# Altium PCB 24+Channel+PCB.pcbdoc (part 1 of 4)
Units mm, origin at the board's own origin, x right, y up, seen from the top; angles counter-clockwise.
Board outline 213.4 x 117.5 mm, 2 copper layers (Top Layer, Bottom Layer); 559 components, 339 nets, 1681 pads, 746 vias.
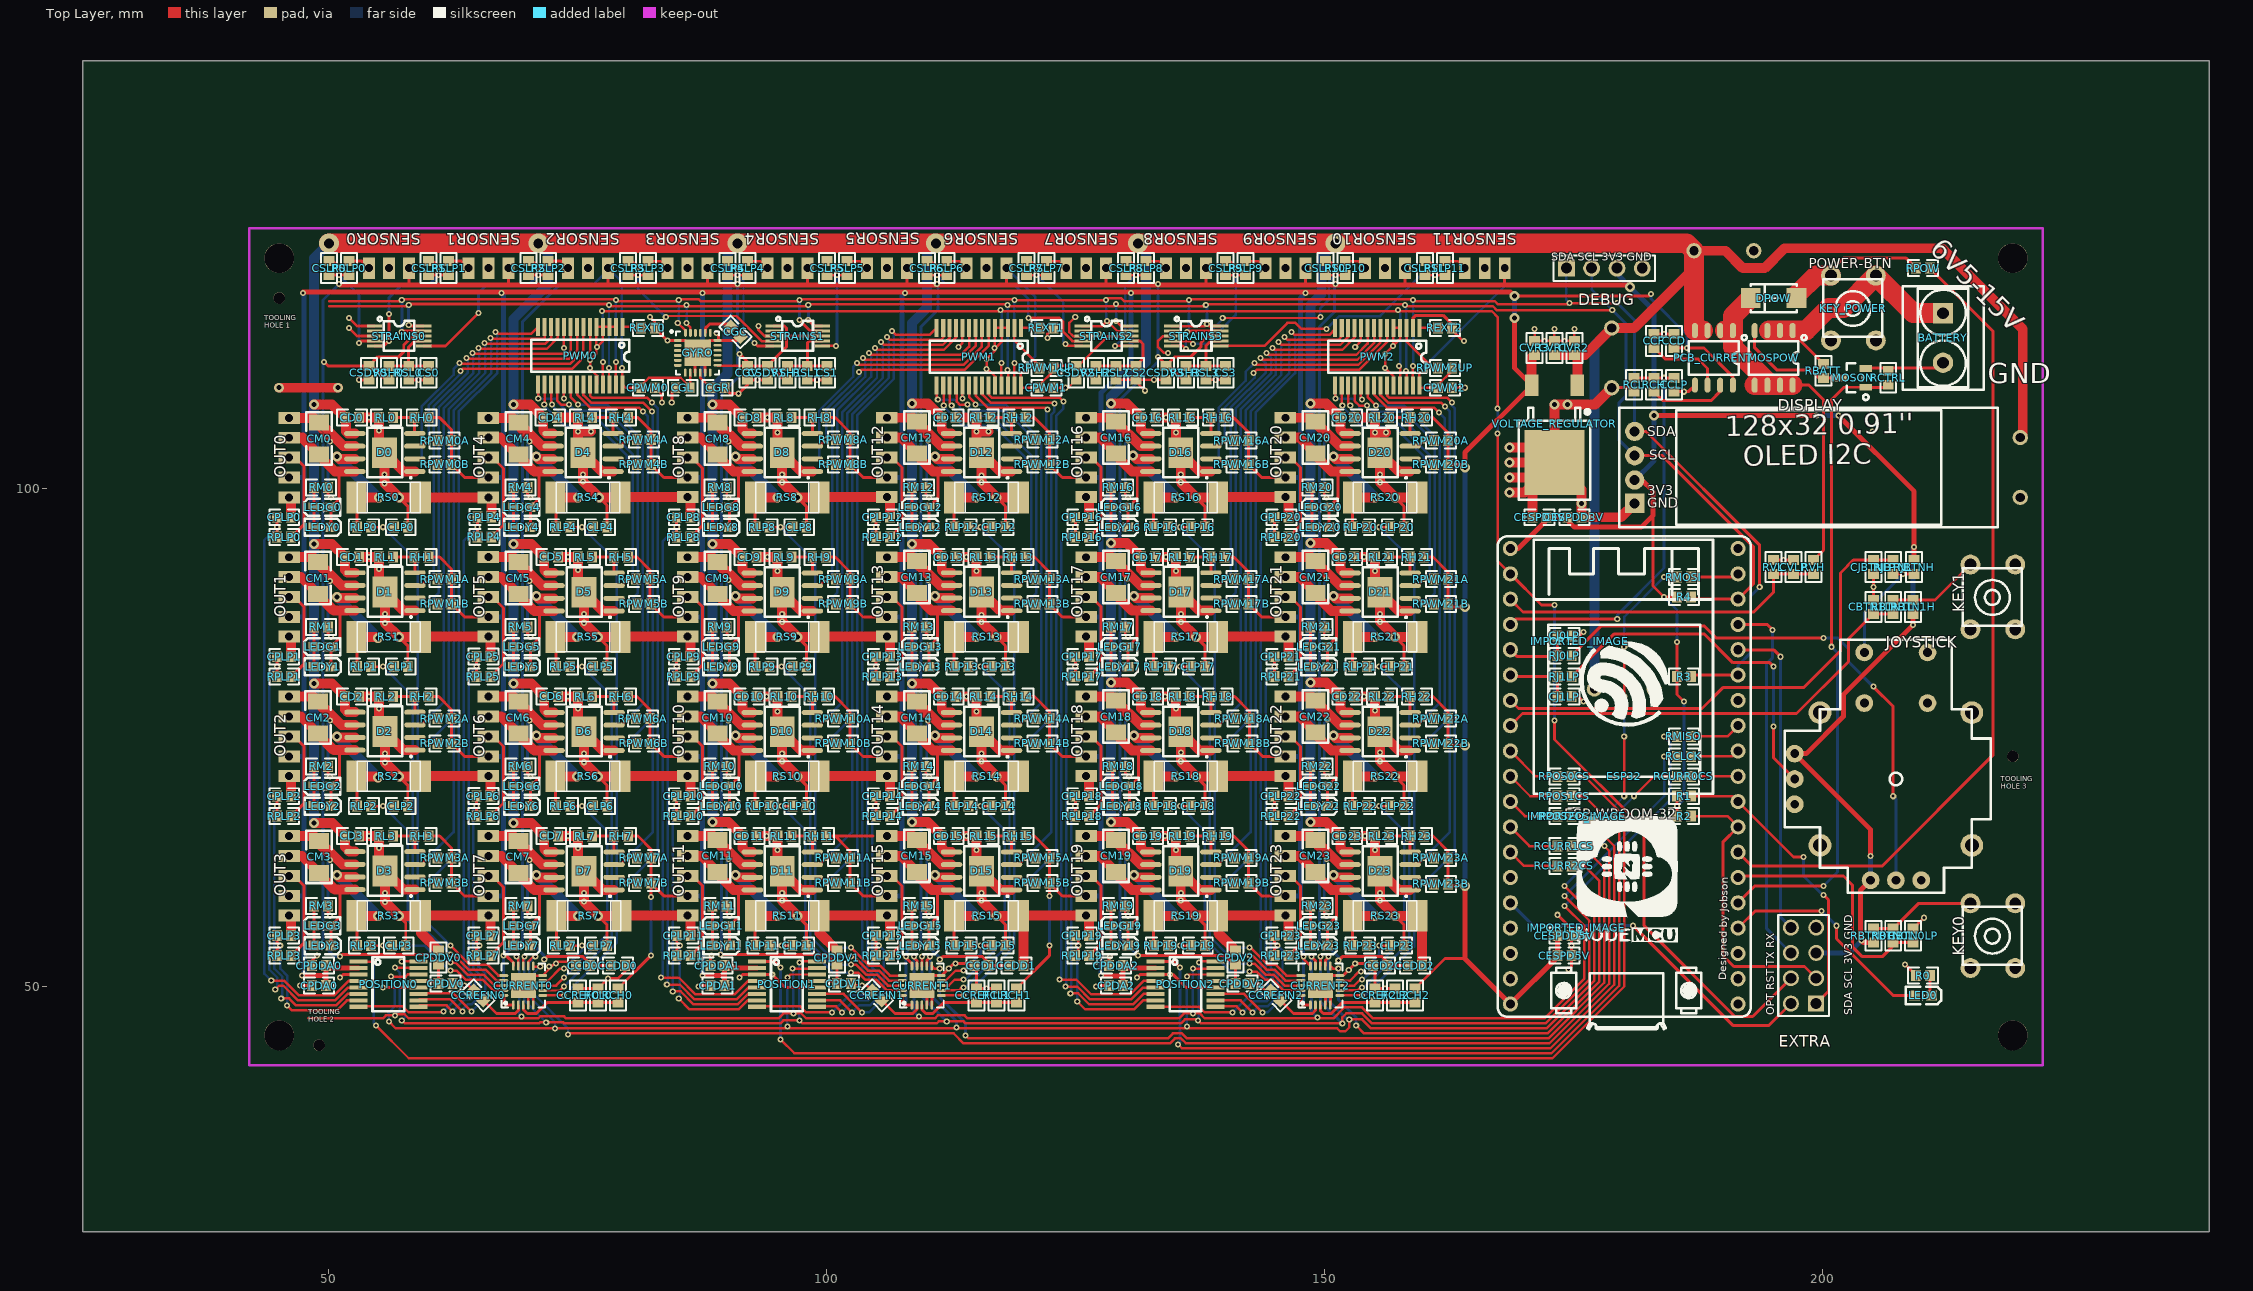
[diagram p0: Top Layer view]
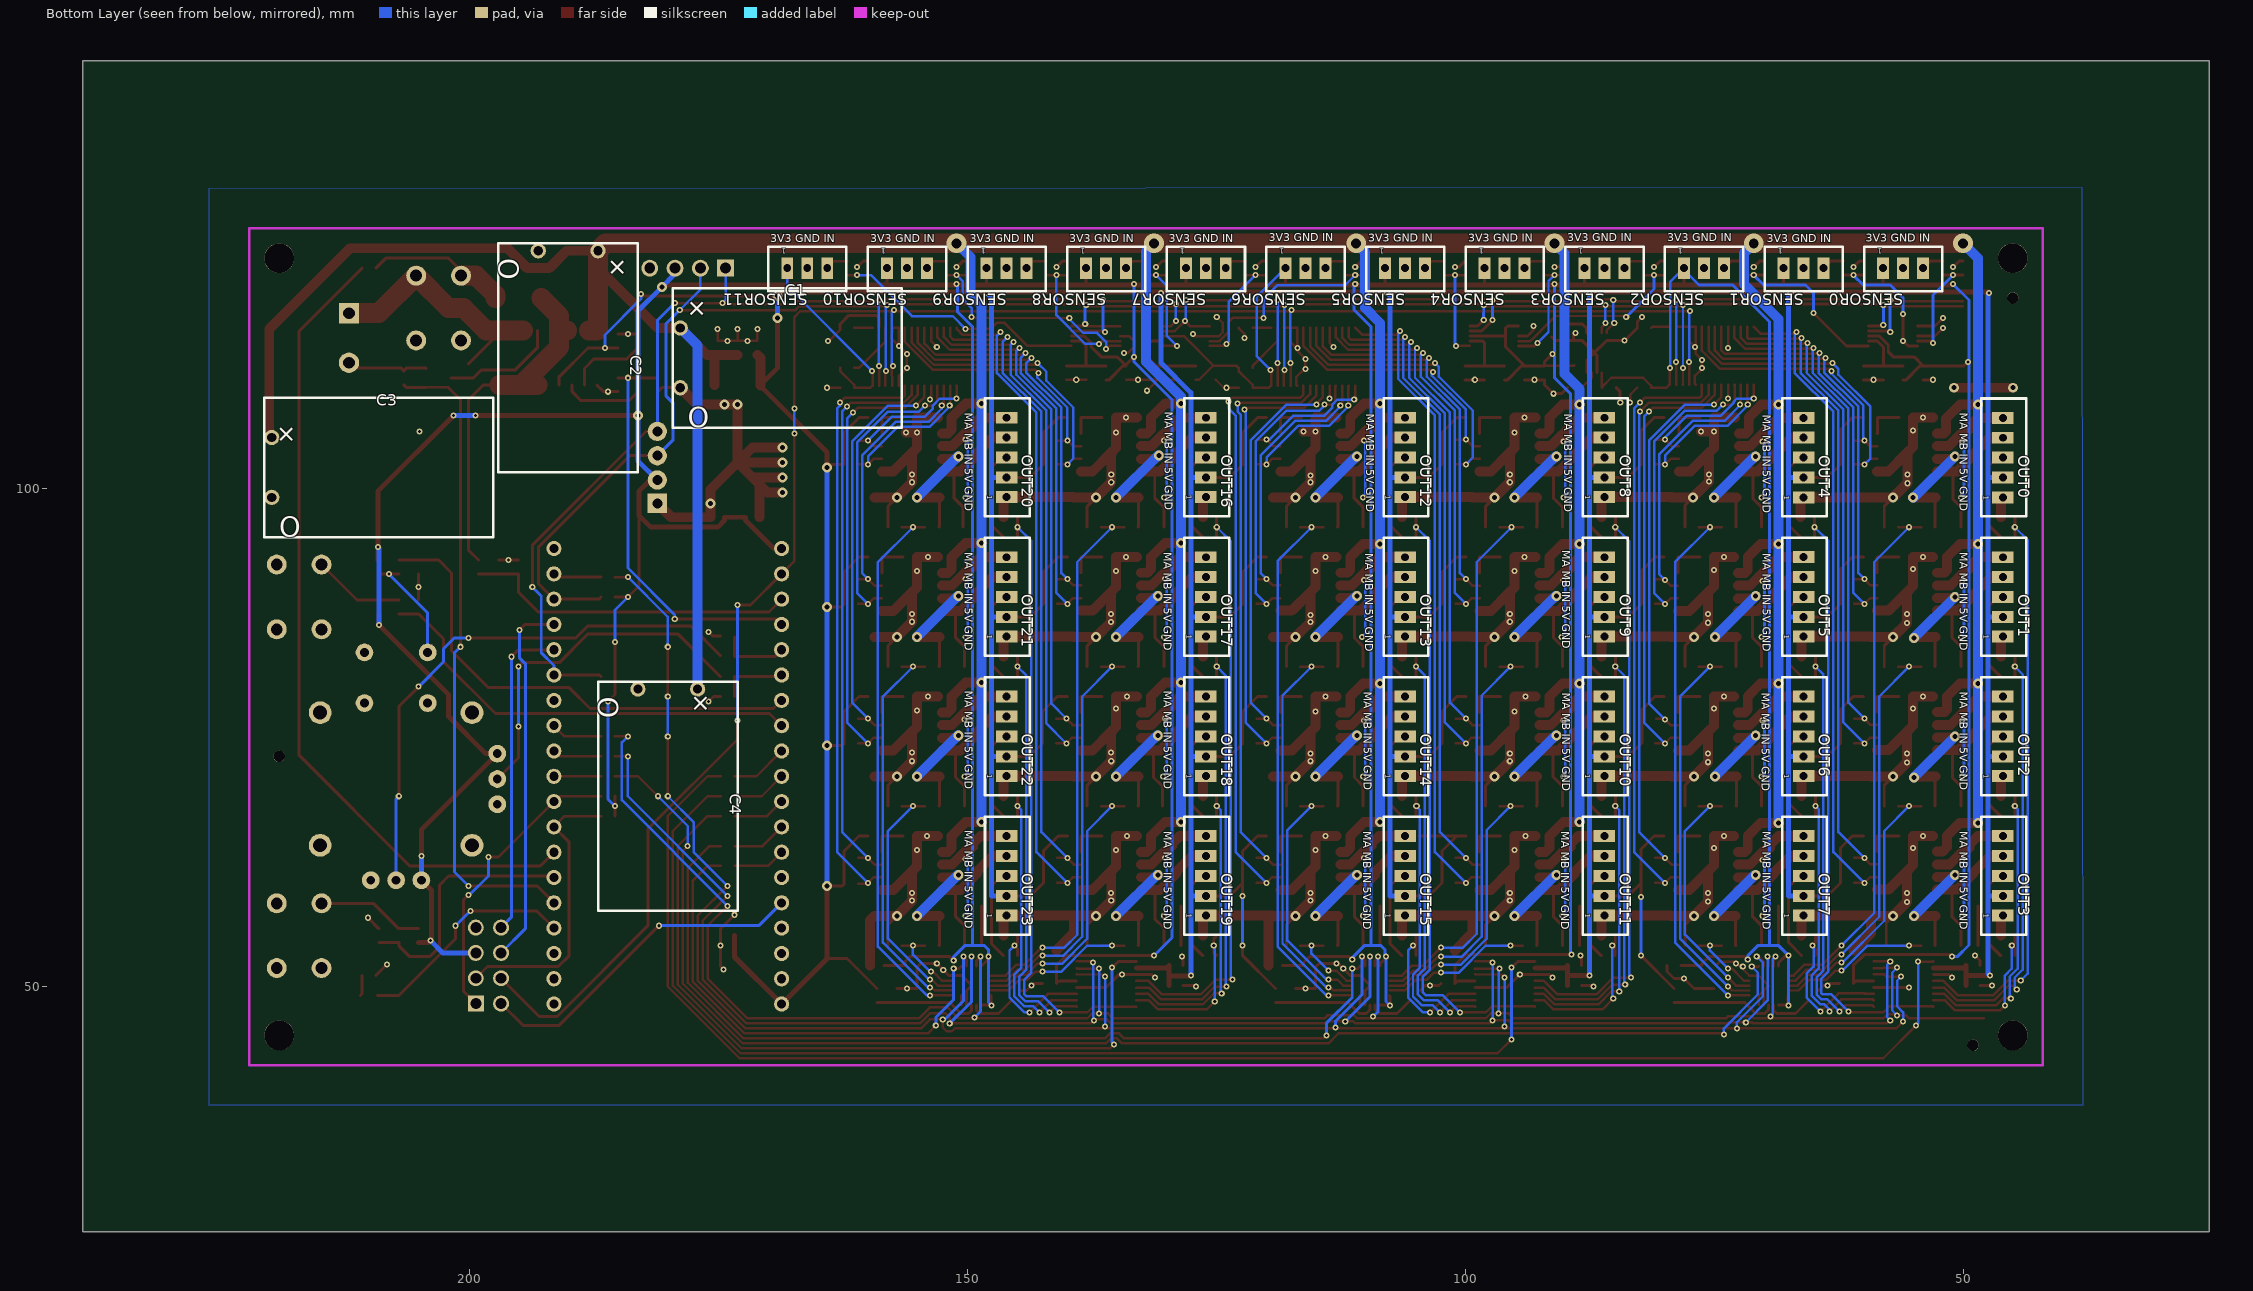
[diagram p1: Bottom Layer view, seen from below]

## Layer stack, top to bottom
Top Layer: signal copper (thickness not stored)
Dielectric: dielectric 0.32, FR-4, Dk 4.8
Bottom Layer: signal copper (thickness not stored)

## Board outline
238.8,25.4 25.4,25.4 25.4,142.9 238.8,142.9

## Components (designator, comment, footprint, x,y, rotation, side; value= is the part's Value field where it differs from the comment)
BATTERY "Screw Terminal" H2-5.0-10.5X8.0MM 212.1,115.099 r0 top
C1 "2200uF" SIDECAP_13X21 168.1,113.1 r0 bottom
C2 "2200uF" SIDECAP_13X21 190.1,113.1 r90 bottom
C3 "2200uF" SIDECAP_13X21 209.1,102.1 r0 bottom
C4 "2200uF" SIDECAP_13X21 180.1,69.1 r90 bottom
CBTN0LP "100nF" 0603 209.1,55.1 r90 top
CBTN1LP "100nF" 0603 205.1,88.1 r90 top
CCD "100nF" 0603 185.1,114.8 r270 top
CCD0 "100nF" 0603 75.6,52.1 r180 top
CCD1 "100nF" 0603 115.6,52.1 r180 top
CCD2 "100nF" 0603 155.6,52.1 r180 top
CCDD0 "10uF" 0603 79.1,52.1 r180 top
CCDD1 "10uF" 0603 119.1,52.1 r180 top
CCDD2 "10uF" 0603 159.1,52.1 r180 top
CCF "100nF" 0603 183.1,114.8 r270 top
CCLP "100nF" 0603 185.1,110.4 r90 top
CCREF0 "100nF" 0603 75.1,49.1 r90 top
CCREF1 "100nF" 0603 115.1,49.1 r90 top
CCREF2 "100nF" 0603 155.1,49.1 r90 top
CCREFIN0 "10uF" 0603 65.1,49.1 r315 top
CCREFIN1 "10uF" 0603 105.1,49.1 r315 top
CCREFIN2 "10uF" 0603 145.1,49.1 r315 top
CD0 "100nF" 0603 52.4,107.1 r180 top
CD1 "100nF" 0603 52.4,93.1 r180 top
CD2 "100nF" 0603 52.4,79.1 r180 top
CD3 "100nF" 0603 52.4,65.124 r180 top
CD4 "100nF" 0603 72.3,107.112 r180 top
CD5 "100nF" 0603 72.4,93.112 r180 top
CD6 "100nF" 0603 72.4,79.112 r180 top
CD7 "100nF" 0603 72.4,65.112 r180 top
CD8 "100nF" 0603 92.3,107.1 r180 top
CD9 "100nF" 0603 92.3,93.1 r180 top
CD10 "100nF" 0603 92.3,79.1 r180 top
CD11 "100nF" 0603 92.3,65.1 r180 top
CD12 "100nF" 0603 112.3,107.1 r180 top
CD13 "100nF" 0603 112.3,93.1 r180 top
CD14 "100nF" 0603 112.3,79.1 r180 top
CD15 "100nF" 0603 112.3,65.1 r180 top
CD16 "100nF" 0603 132.3,107.1 r180 top
CD17 "100nF" 0603 132.3,93.1 r180 top
CD18 "100nF" 0603 132.3,79.1 r180 top
CD19 "100nF" 0603 132.3,65.1 r180 top
CD20 "100nF" 0603 152.3,107.1 r180 top
CD21 "100nF" 0603 152.3,93.1 r180 top
CD22 "100nF" 0603 152.3,79.1 r180 top
CD23 "100nF" 0603 152.3,65.1 r180 top
CESPD3V "100nF" 0603 171.6,97.1 r180 top
CESPD5V "100nF" 0603 174.1,53.1 r0 top
CESPDD3V "10uF" 0603 175.1,97.1 r0 top
CESPDD5V "10uF" 0603 174.1,55.1 r0 top
CGC "2.2nF" 0603 90.9,115.7 r135 top
CGL "10nF" 0603 85.6,110.1 r0 top
CGR "100nF" 0603 89.1,110.1 r0 top
CGV "100nF" 0603 92.1,111.6 r90 top
CJ0LP "100nF" 0603 174.1,85.2 r180 top
CJ1LP "100nF" 0603 174.1,79.1 r180 top
CJBTNLP "100nF" 0603 205.1,92.1 r90 top
CLP0 "100nF" 0603 57.3,96.1 r180 top
CLP1 "100nF" 0603 57.3,82.1 r0 top
CLP2 "100nF" 0603 57.3,68.1 r0 top
CLP3 "100nF" 0603 57.1,54.1 r0 top
CLP4 "100nF" 0603 77.3,96.1 r0 top
CLP5 "100nF" 0603 77.3,82.1 r0 top
CLP6 "100nF" 0603 77.3,68.1 r0 top
CLP7 "100nF" 0603 77.3,54.1 r0 top
CLP8 "100nF" 0603 97.3,96.1 r0 top
CLP9 "100nF" 0603 97.3,82.1 r0 top
CLP10 "100nF" 0603 97.3,68.1 r0 top
CLP11 "100nF" 0603 97.3,54.1 r0 top
CLP12 "100nF" 0603 117.3,96.1 r0 top
CLP13 "100nF" 0603 117.3,82.1 r0 top
CLP14 "100nF" 0603 117.3,68.1 r0 top
CLP15 "100nF" 0603 117.3,54.1 r180 top
CLP16 "100nF" 0603 137.3,96.1 r0 top
CLP17 "100nF" 0603 137.3,82.1 r0 top
CLP18 "100nF" 0603 137.3,68.1 r0 top
CLP19 "100nF" 0603 137.3,54.1 r0 top
CLP20 "100nF" 0603 157.3,96.1 r180 top
CLP21 "100nF" 0603 157.3,82.1 r0 top
CLP22 "100nF" 0603 157.3,68.1 r0 top
CLP23 "100nF" 0603 157.3,54.1 r0 top
CM0 "4.7uF" 1206 49.1,105 r90 top
CM1 "4.7uF" 1206 49,91 r90 top
CM2 "4.7uF" 1206 49,77 r90 top
CM3 "4.7uF" 1206 49.1,63 r90 top
CM4 "4.7uF" 1206 69.1,105 r90 top
CM5 "4.7uF" 1206 69.1,91 r90 top
CM6 "4.7uF" 1206 69.1,77 r90 top
CM7 "4.7uF" 1206 69.1,63 r90 top
CM8 "4.7uF" 1206 89.1,105 r90 top
CM9 "4.7uF" 1206 89.1,91 r90 top
CM10 "4.7uF" 1206 89.1,77 r90 top
CM11 "4.7uF" 1206 89.1,63.1 r90 top
CM12 "4.7uF" 1206 109.1,105.1 r90 top
CM13 "4.7uF" 1206 109.1,91.1 r90 top
CM14 "4.7uF" 1206 109.1,77 r90 top
CM15 "4.7uF" 1206 109.1,63.1 r90 top
CM16 "4.7uF" 1206 129.1,105.1 r90 top
CM17 "4.7uF" 1206 129.1,91.1 r90 top
CM18 "4.7uF" 1206 129.1,77.1 r90 top
CM19 "4.7uF" 1206 129.1,63.1 r90 top
CM20 "4.7uF" 1206 149.1,105.1 r90 top
CM21 "4.7uF" 1206 149.1,91.1 r90 top
CM22 "4.7uF" 1206 149.1,77.1 r90 top
CM23 "4.7uF" 1206 149.1,63.1 r90 top
CPDA0 "100nF" 0603 49.1,50.1 r180 top
CPDA1 "100nF" 0603 89.1,50.1 r180 top
CPDA2 "100nF" 0603 129.1,50.1 r180 top
CPDDA0 "1uF" 0603 49.1,52.1 r180 top
CPDDA1 "1uF" 0603 89.1,52.1 r180 top
CPDDA2 "1uF" 0603 129.1,52.1 r180 top
CPDDV0 "1uF" 0603 61.1,52.9 r90 top
CPDDV1 "1uF" 0603 101.1,52.9 r90 top
CPDDV2 "1uF" 0603 141.8,50.3 r0 top
CPDV0 "100nF" 0603 61.8,50.3 r0 top
CPDV1 "100nF" 0603 101.8,50.3 r0 top
CPDV2 "100nF" 0603 141.1,52.9 r90 top
CPLP0 "100nF" 0603 45.6,97.1 r0 top
CPLP1 "100nF" 0603 45.6,83.1 r0 top
CPLP2 "100nF" 0603 45.6,69.1 r0 top
CPLP3 "100nF" 0603 45.6,55.1 r0 top
CPLP4 "100nF" 0603 65.7,97.124 r0 top
CPLP5 "100nF" 0603 65.6,83.112 r0 top
CPLP6 "100nF" 0603 65.6,69.112 r0 top
CPLP7 "100nF" 0603 65.6,55.112 r0 top
CPLP8 "100nF" 0603 85.7,97.1 r0 top
CPLP9 "100nF" 0603 85.7,83.1 r0 top
CPLP10 "100nF" 0603 85.7,69.1 r0 top
CPLP11 "100nF" 0603 85.7,55.1 r0 top
CPLP12 "100nF" 0603 105.7,97.1 r0 top
CPLP13 "100nF" 0603 105.7,83.1 r0 top
CPLP14 "100nF" 0603 105.7,69.1 r0 top
CPLP15 "100nF" 0603 105.7,55.1 r0 top
CPLP16 "100nF" 0603 125.7,97.1 r0 top
CPLP17 "100nF" 0603 125.7,83.1 r0 top
CPLP18 "100nF" 0603 125.7,69.1 r0 top
CPLP19 "100nF" 0603 125.7,55.1 r0 top
CPLP20 "100nF" 0603 145.7,97.1 r0 top
CPLP21 "100nF" 0603 145.7,83.1 r0 top
CPLP22 "100nF" 0603 145.7,69.1 r0 top
CPLP23 "100nF" 0603 145.7,55.1 r0 top
CPWM0 "100nF" 0603 82.1,110.1 r0 top
CPWM1 "100nF" 0603 122.1,110.1 r0 top
CPWM2 "100nF" 0603 162.1,110.1 r0 top
CS0 "1uF" 0603 60.1,111.6 r270 top
CS1 "1uF" 0603 100.1,111.6 r270 top
CS2 "1uF" 0603 131.1,111.6 r270 top
CS3 "1uF" 0603 140.1,111.6 r270 top
CSDV0 "100nF" 0603 54.1,111.6 r90 top
CSDV1 "100nF" 0603 94.1,111.6 r90 top
CSDV2 "100nF" 0603 125.1,111.6 r90 top
CSDV3 "100nF" 0603 134.1,111.6 r90 top
CSLP0 "1uF" 0603 50.1,122.1 r270 top
CSLP1 "1uF" 0603 60.1,122.1 r270 top
CSLP2 "1uF" 0603 70.1,122.1 r270 top
CSLP3 "1uF" 0603 80.1,122.1 r270 top
CSLP4 "1uF" 0603 90.1,122.1 r270 top
CSLP5 "1uF" 0603 100.1,122.1 r270 top
CSLP6 "1uF" 0603 110.1,122.1 r270 top
CSLP7 "1uF" 0603 120.1,122.1 r270 top
CSLP8 "1uF" 0603 130.1,122.1 r270 top
CSLP9 "1uF" 0603 140.1,122.1 r270 top
CSLP10 "1uF" 0603 150.1,122.1 r270 top
CSLP11 "1uF" 0603 160.1,122.1 r270 top
CURRENT0 "AD7689BCPZRL7" LFCSP-20-DOT-TOP-LEFT 69.6,50.1 r90 top
CURRENT1 "AD7689BCPZRL7" LFCSP-20-DOT-TOP-LEFT 109.6,50.1 r90 top
CURRENT2 "AD7689BCPZRL7" LFCSP-20-DOT-TOP-LEFT 149.6,50.1 r90 top
CVLP "100nF" 0603 197.1,92.1 r270 top
CVR1 "1uF" 0603 173.1,114.1 r270 top
CVR2 "100nF" 0603 175.1,114.1 r270 top
CVR3 "100nF" 0603 171.1,114.1 r270 top
D0 "DRV8870DDAR" HSOP-8_L5.0-W4.0-P1.27-LS6.2-BL-EP 55.7,103.6 r90 top
D1 "DRV8870DDAR" HSOP-8_L5.0-W4.0-P1.27-LS6.2-BL-EP 55.713,89.625 r90 top
D2 "DRV8870DDAR" HSOP-8_L5.0-W4.0-P1.27-LS6.2-BL-EP 55.713,75.625 r90 top
D3 "DRV8870DDAR" HSOP-8_L5.0-W4.0-P1.27-LS6.2-BL-EP 55.713,61.625 r90 top
D4 "DRV8870DDAR" HSOP-8_L5.0-W4.0-P1.27-LS6.2-BL-EP 75.6,103.6 r90 top
D5 "DRV8870DDAR" HSOP-8_L5.0-W4.0-P1.27-LS6.2-BL-EP 75.7,89.6 r90 top
D6 "DRV8870DDAR" HSOP-8_L5.0-W4.0-P1.27-LS6.2-BL-EP 75.7,75.6 r90 top
D7 "DRV8870DDAR" HSOP-8_L5.0-W4.0-P1.27-LS6.2-BL-EP 75.7,61.6 r90 top
D8 "DRV8870DDAR" HSOP-8_L5.0-W4.0-P1.27-LS6.2-BL-EP 95.6,103.6 r90 top
D9 "DRV8870DDAR" HSOP-8_L5.0-W4.0-P1.27-LS6.2-BL-EP 95.6,89.6 r90 top
D10 "DRV8870DDAR" HSOP-8_L5.0-W4.0-P1.27-LS6.2-BL-EP 95.6,75.6 r90 top
D11 "DRV8870DDAR" HSOP-8_L5.0-W4.0-P1.27-LS6.2-BL-EP 95.6,61.6 r90 top
D12 "DRV8870DDAR" HSOP-8_L5.0-W4.0-P1.27-LS6.2-BL-EP 115.6,103.6 r90 top
D13 "DRV8870DDAR" HSOP-8_L5.0-W4.0-P1.27-LS6.2-BL-EP 115.613,89.625 r90 top
D14 "DRV8870DDAR" HSOP-8_L5.0-W4.0-P1.27-LS6.2-BL-EP 115.6,75.6 r90 top
D15 "DRV8870DDAR" HSOP-8_L5.0-W4.0-P1.27-LS6.2-BL-EP 115.6,61.6 r90 top
D16 "DRV8870DDAR" HSOP-8_L5.0-W4.0-P1.27-LS6.2-BL-EP 135.6,103.6 r90 top
D17 "DRV8870DDAR" HSOP-8_L5.0-W4.0-P1.27-LS6.2-BL-EP 135.613,89.625 r90 top
D18 "DRV8870DDAR" HSOP-8_L5.0-W4.0-P1.27-LS6.2-BL-EP 135.6,75.6 r90 top
D19 "DRV8870DDAR" HSOP-8_L5.0-W4.0-P1.27-LS6.2-BL-EP 135.6,61.6 r90 top
D20 "DRV8870DDAR" HSOP-8_L5.0-W4.0-P1.27-LS6.2-BL-EP 155.6,103.6 r90 top
D21 "DRV8870DDAR" HSOP-8_L5.0-W4.0-P1.27-LS6.2-BL-EP 155.6,89.6 r90 top
D22 "DRV8870DDAR" HSOP-8_L5.0-W4.0-P1.27-LS6.2-BL-EP 155.6,75.6 r90 top
D23 "DRV8870DDAR" HSOP-8_L5.0-W4.0-P1.27-LS6.2-BL-EP 155.6,61.6 r90 top
DEBUG "Header-Male-2.54_1x4_C59481" HDR-TH_4P-P2.54-V 178.1,122.1 r0 top
DISPLAY "0.91 oled display 128x32" OLED_DISPLAY_128X32_0.91 217.6,96.1 r180 top
DPOW "M7_C95872" DO-214AC_L4.3-W2.7-LS5.3-RD 195.1,119.1 r0 top
ESP32 "NodeMCU-32SLua" NODEMCU-32SLUA 180.1,71.1 r0 top
EXTRA "Header-Male-2.54_2x4" HDR-TH_8P-P2.54-V-R2-C4-S2.54 198.1,52.1 r90 top
GYRO "MPU-6050_C24112" QFN-24-DOT-BOTTOM-LEFT 87.1,113.6 r270 top
IMPORTED_IMAGE "IMPORTED_IMAGE" IMPORTED_IMAGE 175.642,84.636 r0 top
IMPORTED_IMAGE "IMPORTED_IMAGE" IMPORTED_IMAGE 175.328,67.095 r0 top
IMPORTED_IMAGE "IMPORTED_IMAGE" IMPORTED_IMAGE 175.29,55.888 r0 top
JOYSTICK "Joystick" JOYSTICK 206.1,72.1 r0 top
KEY0 "button6*6*8" KEY-6.0*6.0-2 217.1,55.1 r90 top
KEY1 "button6*6*8" KEY-6.0*6.0-2 217.1,89.1 r90 top
KEY_POWER "button6*6*8" KEY-6.0*6.0-2 203.1,118.099 r90 top
LED0 "19-217/BHC-ZL1M2RY/3T" LED0603-R-RD 210.1,49.1 r180 top
LEDG0 "19-217/GHC-YR1S2/3T" LED0603-R-RD 49.451,98.1 r0 top
LEDG1 "19-217/GHC-YR1S2/3T" LED0603-R-RD 49.451,84.1 r0 top
LEDG2 "19-217/GHC-YR1S2/3T" LED0603-R-RD 49.451,70.1 r0 top
LEDG3 "19-217/GHC-YR1S2/3T" LED0603-R-RD 49.451,56.1 r0 top
LEDG4 "19-217/GHC-YR1S2/3T" LED0603-R-RD 69.451,98.1 r0 top
LEDG5 "19-217/GHC-YR1S2/3T" LED0603-R-RD 69.451,84.1 r0 top
LEDG6 "19-217/GHC-YR1S2/3T" LED0603-R-RD 69.451,70.1 r0 top
LEDG7 "19-217/GHC-YR1S2/3T" LED0603-R-RD 69.451,56.1 r0 top
LEDG8 "19-217/GHC-YR1S2/3T" LED0603-R-RD 89.451,98.1 r0 top
LEDG9 "19-217/GHC-YR1S2/3T" LED0603-R-RD 89.451,84.1 r0 top
LEDG10 "19-217/GHC-YR1S2/3T" LED0603-R-RD 89.451,70.1 r0 top
LEDG11 "19-217/GHC-YR1S2/3T" LED0603-R-RD 89.451,56.1 r0 top
LEDG12 "19-217/GHC-YR1S2/3T" LED0603-R-RD 109.451,98.1 r0 top
LEDG13 "19-217/GHC-YR1S2/3T" LED0603-R-RD 109.451,84.1 r0 top
LEDG14 "19-217/GHC-YR1S2/3T" LED0603-R-RD 109.451,70.1 r0 top
LEDG15 "19-217/GHC-YR1S2/3T" LED0603-R-RD 109.451,56.1 r0 top
LEDG16 "19-217/GHC-YR1S2/3T" LED0603-R-RD 129.451,98.1 r0 top
LEDG17 "19-217/GHC-YR1S2/3T" LED0603-R-RD 129.451,84.1 r0 top
LEDG18 "19-217/GHC-YR1S2/3T" LED0603-R-RD 129.6,70.1 r0 top
LEDG19 "19-217/GHC-YR1S2/3T" LED0603-R-RD 129.451,56.1 r0 top
LEDG20 "19-217/GHC-YR1S2/3T" LED0603-R-RD 149.6,98.1 r0 top
LEDG21 "19-217/GHC-YR1S2/3T" LED0603-R-RD 149.451,84.1 r0 top
LEDG22 "19-217/GHC-YR1S2/3T" LED0603-R-RD 149.451,70.1 r0 top
LEDG23 "19-217/GHC-YR1S2/3T" LED0603-R-RD 149.451,56.1 r0 top
LEDY0 "19-213/Y2C-CQ2R2L/3T(CY)" LED0603-R-RD 49.451,96.1 r180 top
LEDY1 "19-213/Y2C-CQ2R2L/3T(CY)" LED0603-R-RD 49.451,82.1 r180 top
LEDY2 "19-213/Y2C-CQ2R2L/3T(CY)" LED0603-R-RD 49.451,68.1 r180 top
LEDY3 "19-213/Y2C-CQ2R2L/3T(CY)" LED0603-R-RD 49.451,54.1 r180 top
LEDY4 "19-213/Y2C-CQ2R2L/3T(CY)" LED0603-R-RD 69.451,96.1 r180 top
LEDY5 "19-213/Y2C-CQ2R2L/3T(CY)" LED0603-R-RD 69.451,82.1 r180 top
LEDY6 "19-213/Y2C-CQ2R2L/3T(CY)" LED0603-R-RD 69.451,68.1 r180 top
LEDY7 "19-213/Y2C-CQ2R2L/3T(CY)" LED0603-R-RD 69.451,54.1 r180 top
LEDY8 "19-213/Y2C-CQ2R2L/3T(CY)" LED0603-R-RD 89.451,96.1 r180 top
LEDY9 "19-213/Y2C-CQ2R2L/3T(CY)" LED0603-R-RD 89.451,82.1 r180 top
LEDY10 "19-213/Y2C-CQ2R2L/3T(CY)" LED0603-R-RD 89.451,68.1 r180 top
LEDY11 "19-213/Y2C-CQ2R2L/3T(CY)" LED0603-R-RD 89.451,54.1 r180 top
LEDY12 "19-213/Y2C-CQ2R2L/3T(CY)" LED0603-R-RD 109.451,96.1 r180 top
LEDY13 "19-213/Y2C-CQ2R2L/3T(CY)" LED0603-R-RD 109.451,82.1 r180 top
LEDY14 "19-213/Y2C-CQ2R2L/3T(CY)" LED0603-R-RD 109.451,68.1 r180 top
LEDY15 "19-213/Y2C-CQ2R2L/3T(CY)" LED0603-R-RD 109.451,54.1 r180 top
LEDY16 "19-213/Y2C-CQ2R2L/3T(CY)" LED0603-R-RD 129.451,96.1 r180 top
LEDY17 "19-213/Y2C-CQ2R2L/3T(CY)" LED0603-R-RD 129.451,82.1 r180 top
LEDY18 "19-213/Y2C-CQ2R2L/3T(CY)" LED0603-R-RD 129.6,68.1 r180 top
LEDY19 "19-213/Y2C-CQ2R2L/3T(CY)" LED0603-R-RD 129.451,54.1 r180 top
LEDY20 "19-213/Y2C-CQ2R2L/3T(CY)" LED0603-R-RD 149.6,96.1 r180 top
LEDY21 "19-213/Y2C-CQ2R2L/3T(CY)" LED0603-R-RD 149.451,82.1 r180 top
LEDY22 "19-213/Y2C-CQ2R2L/3T(CY)" LED0603-R-RD 149.451,68.1 r180 top
LEDY23 "19-213/Y2C-CQ2R2L/3T(CY)" LED0603-R-RD 149.451,54.1 r180 top
MOSON "2N7002" SOT-23-DOT-TOP-LEFT 203.1,111.1 r180 top
MOSPOW "AO4407A" SOIC-8-DOT-BOT-LEFT 195.099,113.1 r180 top
OUT0 "JST-PH_5-PIN_HEADER" JST_B5B-PH_HEADER 46.1,103.076 r90 bottom
OUT1 "JST-PH_5-PIN_HEADER" JST_B5B-PH_HEADER 46.1,89.1 r90 bottom
OUT2 "JST-PH_5-PIN_HEADER" JST_B5B-PH_HEADER 46.1,75.1 r90 bottom
OUT3 "JST-PH_5-PIN_HEADER" JST_B5B-PH_HEADER 46.1,61.1 r90 bottom
OUT4 "JST-PH_5-PIN_HEADER" JST_B5B-PH_HEADER 66.1,103.088 r90 bottom
OUT5 "JST-PH_5-PIN_HEADER" JST_B5B-PH_HEADER 66.1,89.112 r90 bottom
OUT6 "JST-PH_5-PIN_HEADER" JST_B5B-PH_HEADER 66.1,75.112 r90 bottom
OUT7 "JST-PH_5-PIN_HEADER" JST_B5B-PH_HEADER 66.1,61.1 r90 bottom
OUT8 "JST-PH_5-PIN_HEADER" JST_B5B-PH_HEADER 86.1,103.1 r90 bottom
OUT9 "JST-PH_5-PIN_HEADER" JST_B5B-PH_HEADER 86.1,89.1 r90 bottom
OUT10 "JST-PH_5-PIN_HEADER" JST_B5B-PH_HEADER 86.1,75.1 r90 bottom
OUT11 "JST-PH_5-PIN_HEADER" JST_B5B-PH_HEADER 86.1,61.1 r90 bottom
OUT12 "JST-PH_5-PIN_HEADER" JST_B5B-PH_HEADER 106.1,103.1 r90 bottom
OUT13 "JST-PH_5-PIN_HEADER" JST_B5B-PH_HEADER 106.1,89.1 r90 bottom
OUT14 "JST-PH_5-PIN_HEADER" JST_B5B-PH_HEADER 106.1,75.1 r90 bottom
OUT15 "JST-PH_5-PIN_HEADER" JST_B5B-PH_HEADER 106.1,61.1 r90 bottom
OUT16 "JST-PH_5-PIN_HEADER" JST_B5B-PH_HEADER 126.1,103.1 r90 bottom
OUT17 "JST-PH_5-PIN_HEADER" JST_B5B-PH_HEADER 126.1,89.1 r90 bottom
OUT18 "JST-PH_5-PIN_HEADER" JST_B5B-PH_HEADER 126.1,75.1 r90 bottom
OUT19 "JST-PH_5-PIN_HEADER" JST_B5B-PH_HEADER 126.1,61.1 r90 bottom
OUT20 "JST-PH_5-PIN_HEADER" JST_B5B-PH_HEADER 146.1,103.1 r90 bottom
OUT21 "JST-PH_5-PIN_HEADER" JST_B5B-PH_HEADER 146.1,89.1 r90 bottom
OUT22 "JST-PH_5-PIN_HEADER" JST_B5B-PH_HEADER 146.1,75.1 r90 bottom
OUT23 "JST-PH_5-PIN_HEADER" JST_B5B-PH_HEADER 146.1,61.1 r90 bottom
PCB_CURRENT "ACS712ELCTR-20A-T" SOIC-8-DOT-BOT-LEFT 189.1,113.1 r180 top
POSITION0 "ADC128S102CIMTX/NOPB" TSSOP-16-DOT-BOTTOM-RIGHT 56.1,50.1 r270 top
POSITION1 "ADC128S102CIMTX/NOPB" TSSOP-16-DOT-BOTTOM-RIGHT 96.1,50.1 r270 top
POSITION2 "ADC128S102CIMTX/NOPB" TSSOP-16-DOT-BOTTOM-RIGHT 136.1,50.1 r270 top
PWM0 "TLC59116IPWR" TSSOP-28_L9.8-W3.0-P0.66-LS6.4-BL 75.1,113.2 r180 top
PWM1 "TLC59116IPWR" TSSOP-28_L9.8-W3.0-P0.66-LS6.4-BL 115.1,113.1 r180 top
PWM2 "TLC59116IPWR" TSSOP-28_L9.8-W3.0-P0.66-LS6.4-BL 155.1,113.1 r180 top
R0 "1K" 0603 210.1,51.1 r0 top
R1 "1K" 0603 186.1,69.1 r180 top
R2 "1K" 0603 186.1,67.1 r180 top
R3 "1K" 0603 186.1,81.1 r180 top
R4 "1K" 0603 186.1,89.1 r180 top
RBATT "10K" 0603 200.1,111.8 r90 top
RBTN0H "10K" 0603 205.1,55.1 r90 top
RBTN0L "1K" 0603 207.1,55.1 r90 top
RBTN1H "10K" 0603 209.1,88.1 r90 top
RBTN1L "1K" 0603 207.1,88.1 r90 top
RCH "2K" 0603 183.1,110.4 r270 top
RCH0 "8.2K" 0603 79.1,49.1 r270 top
RCH1 "8.2K" 0603 119.1,49.1 r270 top
RCH2 "8.2K" 0603 159.1,49.1 r270 top
RCL "2K" 0603 181.1,110.4 r90 top
RCL0 "2K" 0603 77.1,49.1 r270 top
RCL1 "2K" 0603 117.1,49.1 r270 top
RCL2 "2K" 0603 157.1,49.1 r270 top
RCLCK "100" 0603 186.1,73.1 r0 top
RCTRL "10K" 0603 206.6,111.1 r270 top
RCURR0CS "100" 0603 186.1,71.1 r0 top
RCURR1CS "100" 0603 174.1,64.1 r0 top
RCURR2CS "100" 0603 174.1,62.1 r0 top
REXT0 "1K" 0603 82.1,116.1 r180 top
REXT1 "1K" 0603 122.1,116.1 r180 top
REXT2 "1K" 0603 162.1,116.1 r180 top
RH0 "10K" 0603 59.4,107.1 r0 top
RH1 "10K" 0603 59.4,93.1 r0 top
RH2 "10K" 0603 59.4,79.1 r0 top
RH3 "10K" 0603 59.4,65.1 r0 top
RH4 "10K" 0603 79.4,107.1 r0 top
RH5 "10K" 0603 79.4,93.1 r0 top
RH6 "10K" 0603 79.4,79.1 r0 top
RH7 "10K" 0603 79.4,65.1 r0 top
RH8 "10K" 0603 99.3,107.1 r0 top
RH9 "10K" 0603 99.3,93.1 r0 top
RH10 "10K" 0603 99.3,79.1 r0 top
RH11 "10K" 0603 99.3,65.1 r0 top
RH12 "10K" 0603 119.3,107.1 r0 top
RH13 "10K" 0603 119.3,93.1 r0 top
RH14 "10K" 0603 119.3,79.1 r0 top
RH15 "10K" 0603 119.3,65.1 r0 top
RH16 "10K" 0603 139.3,107.1 r0 top
RH17 "10K" 0603 139.3,93.1 r0 top
RH18 "10K" 0603 139.3,79.1 r0 top
RH19 "10K" 0603 139.3,65.1 r0 top
RH20 "10K" 0603 159.3,107.1 r0 top
RH21 "10K" 0603 159.3,93.1 r0 top
RH22 "10K" 0603 159.3,79.1 r0 top
RH23 "10K" 0603 159.3,65.1 r0 top
RJ0LP "1K" 0603 174.1,83.2 r180 top
RJ1LP "1K" 0603 174.1,81.1 r180 top
RJBTNH "10K" 0603 209.2,92.1 r90 top
RJBTNL "1K" 0603 207.1,92.1 r90 top
RL0 "10K" 0603 55.8,107.1 r180 top
RL1 "10K" 0603 55.8,93.1 r180 top
RL2 "10K" 0603 55.8,79.1 r180 top
RL3 "10K" 0603 55.8,65.1 r180 top
RL4 "10K" 0603 75.8,107.1 r180 top
RL5 "10K" 0603 75.8,93.1 r180 top
RL6 "10K" 0603 75.8,79.1 r180 top
RL7 "10K" 0603 75.8,65.1 r180 top
RL8 "10K" 0603 95.8,107.1 r180 top
RL9 "10K" 0603 95.8,93.1 r180 top
RL10 "10K" 0603 95.8,79.1 r180 top
RL11 "10K" 0603 95.8,65.1 r180 top
RL12 "10K" 0603 115.8,107.1 r180 top
RL13 "10K" 0603 115.8,93.1 r180 top
RL14 "10K" 0603 115.8,79.1 r180 top
RL15 "10K" 0603 115.8,65.1 r180 top
RL16 "10K" 0603 135.8,107.1 r180 top
RL17 "10K" 0603 135.8,93.1 r180 top
RL18 "10K" 0603 135.8,79.1 r180 top
RL19 "10K" 0603 135.8,65.1 r180 top
RL20 "10K" 0603 155.8,107.1 r180 top
RL21 "10K" 0603 155.8,93.1 r180 top
RL22 "10K" 0603 155.8,79.1 r180 top
RL23 "10K" 0603 155.8,65.1 r180 top
RLP0 "100" 0603 53.6,96.1 r180 top
RLP1 "100" 0603 53.6,82.1 r0 top
RLP2 "100" 0603 53.6,68.1 r0 top
RLP3 "100" 0603 53.6,54.1 r0 top
RLP4 "100" 0603 73.6,96.1 r0 top
RLP5 "100" 0603 73.6,82.1 r0 top
RLP6 "100" 0603 73.6,68.1 r0 top
RLP7 "100" 0603 73.6,54.1 r0 top
RLP8 "100" 0603 93.6,96.1 r0 top
RLP9 "100" 0603 93.6,82.1 r0 top
RLP10 "100" 0603 93.6,68.1 r0 top
RLP11 "100" 0603 93.6,54.1 r0 top
RLP12 "100" 0603 113.6,96.1 r0 top
RLP13 "100" 0603 113.6,82.1 r0 top
RLP14 "100" 0603 113.6,68.1 r0 top
RLP15 "100" 0603 113.6,54.1 r180 top
RLP16 "100" 0603 133.6,96.1 r0 top
RLP17 "100" 0603 133.6,82.1 r0 top
RLP18 "100" 0603 133.6,68.1 r0 top
RLP19 "100" 0603 133.6,54.1 r0 top
RLP20 "100" 0603 153.6,96.1 r0 top
RLP21 "100" 0603 153.6,82.1 r0 top
RLP22 "100" 0603 153.6,68.1 r0 top
RLP23 "100" 0603 153.6,54.1 r180 top
RM0 "1K" 0603 49.3,100.1 r180 top
RM1 "1K" 0603 49.3,86.1 r180 top
RM2 "1K" 0603 49.3,72.1 r180 top
RM3 "1K" 0603 49.3,58.1 r180 top
RM4 "1K" 0603 69.3,100.1 r180 top
RM5 "1K" 0603 69.3,86.1 r180 top
RM6 "1K" 0603 69.3,72.1 r180 top
RM7 "1K" 0603 69.3,58.1 r180 top
RM8 "1K" 0603 89.3,100.1 r180 top
RM9 "1K" 0603 89.3,86.1 r180 top
RM10 "1K" 0603 89.3,72.1 r180 top
RM11 "1K" 0603 89.3,58.1 r180 top
RM12 "1K" 0603 109.3,100.1 r180 top
RM13 "1K" 0603 109.3,86.1 r180 top
RM14 "1K" 0603 109.3,72.1 r180 top
RM15 "1K" 0603 109.3,58.1 r180 top
RM16 "1K" 0603 129.3,100.1 r180 top
RM17 "1K" 0603 129.3,86.1 r180 top
RM18 "1K" 0603 129.3,72.1 r180 top
RM19 "1K" 0603 129.3,58.1 r180 top
RM20 "1K" 0603 149.3,100.1 r180 top
RM21 "1K" 0603 149.3,86.1 r180 top
RM22 "1K" 0603 149.3,72.1 r180 top
RM23 "1K" 0603 149.3,58.1 r180 top
RMISO "100" 0603 186.1,75.1 r0 top
RMOSI "100" 0603 186.1,91.1 r0 top
RPLP0 "100" 0603 45.6,95.1 r0 top
RPLP1 "100" 0603 45.6,81.1 r0 top
RPLP2 "100" 0603 45.6,67.1 r0 top
RPLP3 "100" 0603 45.6,53.1 r0 top
RPLP4 "100" 0603 65.7,95.125 r180 top
RPLP5 "100" 0603 65.6,81.112 r180 top
RPLP6 "100" 0603 65.6,67.112 r180 top
RPLP7 "100" 0603 65.6,53.112 r180 top
RPLP8 "100" 0603 85.7,95.1 r0 top
RPLP9 "100" 0603 85.7,81.1 r0 top
RPLP10 "100" 0603 85.7,67.1 r0 top
RPLP11 "100" 0603 85.7,53.1 r0 top
RPLP12 "100" 0603 105.7,95.1 r180 top
RPLP13 "100" 0603 105.7,81.1 r180 top
RPLP14 "100" 0603 105.7,67.1 r180 top
RPLP15 "100" 0603 105.7,53.1 r180 top
RPLP16 "100" 0603 125.7,95.1 r0 top
RPLP17 "100" 0603 125.7,81.1 r0 top
RPLP18 "100" 0603 125.7,67.1 r0 top
RPLP19 "100" 0603 125.7,53.1 r0 top
RPLP20 "100" 0603 145.7,95.1 r180 top
RPLP21 "100" 0603 145.7,81.1 r180 top
RPLP22 "100" 0603 145.7,67.1 r180 top
RPLP23 "100" 0603 145.7,53.1 r180 top
RPOS0CS "100" 0603 174.1,71.1 r0 top
RPOS1CS "100" 0603 174.1,69.1 r0 top
RPOS2CS "100" 0603 174.1,67.1 r0 top
RPOW "10K" 0603 210.1,122.1 r180 top
RPWM0A "10K" 0603 61.7,104.8 r180 top
RPWM0B "10K" 0603 61.7,102.4 r180 top
RPWM1A "10K" 0603 61.7,90.9 r180 top
RPWM1B "10K" 0603 61.7,88.4 r180 top
RPWM1UP "2K" 0603 122.1,112.1 r0 top
RPWM2A "10K" 0603 61.7,76.9 r180 top
RPWM2B "10K" 0603 61.7,74.4 r180 top
RPWM2UP "2K" 0603 162.1,112.1 r0 top
RPWM3A "10K" 0603 61.7,62.9 r180 top
RPWM3B "10K" 0603 61.7,60.4 r180 top
RPWM4A "10K" 0603 81.7,104.9 r0 top
RPWM4B "10K" 0603 81.7,102.4 r0 top
RPWM5A "10K" 0603 81.6,90.9 r0 top
RPWM5B "10K" 0603 81.7,88.4 r0 top
RPWM6A "10K" 0603 81.6,76.9 r0 top
RPWM6B "10K" 0603 81.7,74.4 r0 top
RPWM7A "10K" 0603 81.7,62.9 r0 top
RPWM7B "10K" 0603 81.7,60.4 r0 top
RPWM8A "10K" 0603 101.7,104.9 r180 top
RPWM8B "10K" 0603 101.7,102.4 r180 top
RPWM9A "10K" 0603 101.7,90.9 r180 top
RPWM9B "10K" 0603 101.7,88.4 r180 top
RPWM10A "10K" 0603 101.7,76.9 r180 top
RPWM10B "10K" 0603 101.7,74.4 r180 top
RPWM11A "10K" 0603 101.7,62.9 r180 top
RPWM11B "10K" 0603 101.7,60.4 r180 top
RPWM12A "10K" 0603 121.7,104.9 r0 top
RPWM12B "10K" 0603 121.7,102.4 r0 top
RPWM13A "10K" 0603 121.7,90.9 r0 top
RPWM13B "10K" 0603 121.7,88.4 r0 top
RPWM14A "10K" 0603 121.7,76.9 r0 top
RPWM14B "10K" 0603 121.7,74.4 r0 top
RPWM15A "10K" 0603 121.7,62.9 r0 top
RPWM15B "10K" 0603 121.7,60.4 r0 top
RPWM16A "10K" 0603 141.7,104.8 r180 top
RPWM16B "10K" 0603 141.7,102.4 r180 top
RPWM17A "10K" 0603 141.7,90.9 r180 top
RPWM17B "10K" 0603 141.7,88.4 r180 top
RPWM18A "10K" 0603 141.8,76.9 r180 top
RPWM18B "10K" 0603 141.8,74.4 r180 top
RPWM19A "10K" 0603 141.7,62.9 r180 top
RPWM19B "10K" 0603 141.7,60.4 r180 top
RPWM20A "10K" 0603 161.7,104.8 r0 top
RPWM20B "10K" 0603 161.7,102.4 r0 top
RPWM21A "10K" 0603 161.7,90.9 r0 top
RPWM21B "10K" 0603 161.7,88.4 r0 top
RPWM22A "10K" 0603 161.7,76.9 r0 top
RPWM22B "10K" 0603 161.7,74.4 r0 top
RPWM23A "10K" 0603 161.7,62.9 r0 top
RPWM23B "10K" 0603 161.7,60.3 r0 top
RS0 "0.1" 2512 56.1,99.1 r180 top
RS1 "0.1" 2512 56.1,85.1 r180 top
RS2 "0.1" 2512 56.1,71.1 r180 top
RS3 "0.1" 2512 56.1,57.1 r180 top
RS4 "0.1" 2512 76.1,99.1 r180 top
RS5 "0.1" 2512 76.1,85.1 r180 top
RS6 "0.1" 2512 76.1,71.1 r180 top
RS7 "0.1" 2512 76.2,57.1 r180 top
RS8 "0.1" 2512 96.1,99.1 r180 top
RS9 "0.1" 2512 96.1,85.1 r180 top
RS10 "0.1" 2512 96.1,71.1 r180 top
RS11 "0.1" 2512 96.1,57.1 r180 top
RS12 "0.1" 2512 116.1,99.1 r180 top
RS13 "0.1" 2512 116.1,85.1 r180 top
RS14 "0.1" 2512 116.1,71.1 r180 top
RS15 "0.1" 2512 116.1,57.1 r180 top
RS16 "0.1" 2512 136.1,99.1 r180 top
RS17 "0.1" 2512 136.1,85.1 r180 top
RS18 "0.1" 2512 136.1,71.1 r180 top
RS19 "0.1" 2512 136.1,57.1 r180 top
RS20 "0.1" 2512 156.1,99.1 r180 top
RS21 "0.1" 2512 156.1,85.1 r180 top
RS22 "0.1" 2512 156.1,71.1 r180 top
RS23 "0.1" 2512 156.1,57.1 r180 top
RSH0 "2K" 0603 56.1,111.6 r90 top
RSH1 "2K" 0603 96.1,111.6 r90 top
RSH2 "2K" 0603 127.1,111.6 r90 top
RSH3 "2K" 0603 136.1,111.6 r90 top
RSL0 "2K" 0603 58.1,111.6 r270 top
RSL1 "2K" 0603 98.1,111.6 r270 top
RSL2 "2K" 0603 129.1,111.6 r270 top
RSL3 "2K" 0603 138.1,111.6 r270 top
RSLP0 "100" 0603 52.1,122.1 r270 top
RSLP1 "100" 0603 62.1,122.1 r270 top
RSLP2 "100" 0603 72.1,122.1 r270 top
RSLP3 "100" 0603 82.1,122.1 r270 top
RSLP4 "100" 0603 92.1,122.1 r270 top
RSLP5 "100" 0603 102.1,122.1 r270 top
RSLP6 "100" 0603 112.1,122.1 r270 top
RSLP7 "100" 0603 122.1,122.1 r270 top
RSLP8 "100" 0603 132.1,122.1 r270 top
RSLP9 "100" 0603 142.1,122.1 r270 top
RSLP10 "100" 0603 152.1,122.1 r270 top
RSLP11 "100" 0603 162.1,122.1 r270 top
RVH "8.2K" 0603 199.1,92.1 r90 top
RVL "2K" 0603 195.1,92.1 r270 top
SENSOR0 "JST-PH_3-PIN_HEADER" JST_B3B-PH_HEADER 56.1,122.1 r180 bottom
SENSOR1 "JST-PH_3-PIN_HEADER" JST_B3B-PH_HEADER 66.1,122.1 r180 bottom
SENSOR2 "JST-PH_3-PIN_HEADER" JST_B3B-PH_HEADER 76.1,122.1 r180 bottom
SENSOR3 "JST-PH_3-PIN_HEADER" JST_B3B-PH_HEADER 86.1,122.1 r180 bottom
SENSOR4 "JST-PH_3-PIN_HEADER" JST_B3B-PH_HEADER 96.1,122.1 r180 bottom
SENSOR5 "JST-PH_3-PIN_HEADER" JST_B3B-PH_HEADER 106.1,122.1 r180 bottom
SENSOR6 "JST-PH_3-PIN_HEADER" JST_B3B-PH_HEADER 116.1,122.1 r180 bottom
SENSOR7 "JST-PH_3-PIN_HEADER" JST_B3B-PH_HEADER 126.1,122.1 r180 bottom
SENSOR8 "JST-PH_3-PIN_HEADER" JST_B3B-PH_HEADER 136.1,122.1 r180 bottom
SENSOR9 "JST-PH_3-PIN_HEADER" JST_B3B-PH_HEADER 146.1,122.1 r180 bottom
SENSOR10 "JST-PH_3-PIN_HEADER" JST_B3B-PH_HEADER 156.1,122.1 r180 bottom
SENSOR11 "JST-PH_3-PIN_HEADER" JST_B3B-PH_HEADER 166.1,122.1 r180 bottom
STRAINS0 "ADS1115IDGSR" MSOP-10-DOT-BOT-LEFT 57.101,115.099 r270 top
STRAINS1 "ADS1115IDGSR" MSOP-10-DOT-BOT-LEFT 97.1,115.1 r270 top
STRAINS2 "ADS1115IDGSR" MSOP-10-DOT-BOT-LEFT 128.099,115.099 r270 top
STRAINS3 "ADS1115IDGSR" MSOP-10-DOT-BOT-LEFT 137.101,115.099 r270 top
VOLTAGE_REGULATOR "L78M05ABDT-TR" TO-252-2-DOT-TOP-LEFT 173.1,106.476 r270 top

## Footprints (in the part's own frame and the unit in brackets; to place one, negate y for a bottom-side part, rotate by r counter-clockwise, add the part's x,y. Pads: shape width x height; smd on the part's side, far side on the other; paste and mask are expansions set on the pad)
0603 [mm]
  rect 1x1.1 smd: 1(-0.7,0) 2(0.7,0)
  silkscreen extent -1.5,-0.8 1.5,0.8
1206 [mm]
  rect 1.6x2 smd: 1(-1.6,0) 2(1.6,0)
  silkscreen extent -2.61,-1.27 2.62,1.27
2512 [mil]
  rect 78.7x126 smd: 1(-128,0) 2(128,0)
  silkscreen extent -125,-60 125,60
DO-214AC_L4.3-W2.7-LS5.3-RD [mm]
  rect 2x2 smd: 1(-2.3,0) 2(2.3,0)
  silkscreen extent -2.3,-1.4 2.3,1.4
H2-5.0-10.5X8.0MM [mil]
  rect 80x80 hole 46: 1(0,98)
  round 80 hole 46: 2(0,-98)
  silkscreen extent -160,-205 160,205
HDR-TH_4P-P2.54-V [mm]
  rect 1.7x1.7 hole 1.1: 1(-3.81,0)
  round 1.7 hole 1.1: 2(-1.27,0) 3(1.27,0) 4(3.81,0)
  silkscreen extent -5.08,-1.27 5.08,1.27
HDR-TH_8P-P2.54-V-R2-C4-S2.54 [mm]
  rect 1.6x1.6 hole 1.1: 1(-3.81,-1.27)
  round 1.6 hole 1.1: 2(-3.81,1.27) 3(-1.27,-1.27) 4(-1.27,1.27) 5(1.27,-1.27) 6(1.27,1.27) 7(3.81,-1.27) 8(3.81,1.27)
  silkscreen extent -5.08,-2.54 5.08,2.54
HSOP-8_L5.0-W4.0-P1.27-LS6.2-BL-EP [mm]
  oval 0.5x2.15 smd: 1(-1.905,-3.01) 2(-0.635,-3.01) 3(0.635,-3.01) 4(1.905,-3.01) 5(1.905,3.01) 6(0.635,3.01) 7(-0.635,3.01) 8(-1.905,3.01)
  rect 3.1x2.5 smd: 9(-0.025,0.013)
  silkscreen extent -2.6,-2.67 2.5,1.75
IMPORTED_IMAGE [mm]
  silkscreen extent 0,-8.55 8.85,0
JOYSTICK [mil]
  round 70 hole 35.4: B1A(-75,450) B1B(175,450) B2A(-75,250) B2B(175,250)
  round 70 hole 35: H1(-50,-450) H2(50,-450) H3(150,-450) V1(-350,50) V2(-350,-50) V3(-350,-150)
  round 90 hole 55: MOUNT1(-250,212) MOUNT2(-250,-312) MOUNT3(350,-312) MOUNT4(350,212)
  silkscreen extent -390,-500 425,500
JST_B3B-PH_HEADER [mil]
  rect 47.2x85 hole 31.4: P1(-79,0) P2(0,0) P3(79,0)
  silkscreen extent -154,-92 155,85
JST_B5B-PH_HEADER [mil]
  rect 47.2x85 hole 31.4: P1(-157,0) P2(-79,0) P3(0,0) P4(79,0) P5(157,0)
  silkscreen extent -232,-92 234,85
KEY-6.0*6.0-2 [mm]
  round 2 hole 1.2: 1(3.25,-2.25) 2(-3.25,-2.25) 3(3.25,2.25) 4(-3.25,2.25)
  silkscreen extent -2.9,-2.9 2.9,3
LED0603-R-RD [mil]
  rect 43x39 smd: 1(33.5,0) 2(-33.5,0)
  silkscreen extent -72,-34 70,34
LFCSP-20-DOT-TOP-LEFT [mm]
  oval 0.9x0.28 smd: 1(-1.95,1) 2(-1.95,0.5) 3(-1.95,0) 4(-1.95,-0.5) 5(-1.95,-1) 11(1.95,-1) 12(1.95,-0.5) 13(1.95,0) 14(1.95,0.5) 15(1.95,1)
  oval 0.28x0.9 smd: 6(-1,-1.95) 7(-0.5,-1.95) 8(0,-1.95) 9(0.5,-1.95) 10(1,-1.95) 16(1,1.95) 17(0.5,1.95) 18(0,1.95) 19(-0.5,1.95) 20(-1,1.95)
  rect 2.5x2.5 smd: 21(0,0)
  silkscreen extent -2.2,-2.2 2.2,2.2
MSOP-10-DOT-BOT-LEFT [mil]
  rect 12x61.02 smd: 1(-46.87,-95) 2(-27.18,-95) 3(-7.5,-95) 4(12.19,-95) 5(31.87,-95) 6(31.87,98) 7(12.19,98) 8(-7.5,98) 9(-27.18,98) 10(-46.87,98)
  silkscreen extent -83,-83 52,62
NODEMCU-32SLUA [mm]
OLED_DISPLAY_128X32_0.91 [mil]
  round 76 hole 39.4: P$1(1435,-378.68) P$2(1435,-282.55) P$4(1435,-186.43)
  rect 76x76 hole 39.4: P$3(1435,-94.29)
  silkscreen extent 0,-472 1496,0
QFN-24-DOT-BOTTOM-LEFT [mm]
  oval 0.28x0.8 smd: 1(-1.244,-2) 2(-0.744,-2) 3(-0.244,-2) 4(0.254,-2) 5(0.754,-2) 6(1.255,-2) 13(1.245,2) 14(0.744,2) 15(0.244,2) 16(-0.254,2) 17(-0.754,2) 18(-1.255,2)
  oval 0.8x0.28 smd: 7(1.987,-1.245) 8(1.987,-0.744) 9(1.987,-0.244) 10(1.987,0.254) 11(1.987,0.754) 12(1.987,1.255) 19(-2.013,1.27) 20(-2.013,0.77) 21(-2.013,0.269) 22(-2.013,-0.229) 23(-2.013,-0.729) 24(-2.013,-1.229)
  rect 2.68x2.68 smd: 25(0,0)
  silkscreen extent -2.36,-2.84 2.15,2.15
SIDECAP_13X21 [mil]
  round 60 hole 36: 1(423.23,-118.11) 2(423.23,118.11)
  silkscreen extent -453,-276 453,276
SOIC-8-DOT-BOT-LEFT [mm]
  oval 0.6x1.52 smd: 1(-1.905,-2.74) 2(-0.635,-2.74) 3(0.635,-2.74) 4(1.905,-2.74) 5(1.905,2.74) 6(0.635,2.74) 7(-0.635,2.74) 8(-1.905,2.74)
  silkscreen extent -3.3,-2.29 2.5,1.7
SOT-23-DOT-TOP-LEFT [mm]
  rect 1.25x0.7 smd: 1(-1.25,0.95) 2(-1.25,-0.95) 3(1.25,0)
  silkscreen extent -1.53,-1.46 0.65,2.23
TO-252-2-DOT-TOP-LEFT [mm]
  rect 2.2x1.35 smd: 1(-3.876,2.29) 3(-3.871,-2.29)
  rect 6.5x6 smd: 4(3.876,0)
  silkscreen extent -1.61,-3.57 7.64,3.57
TSSOP-16-DOT-BOTTOM-RIGHT [mil]
  rect 16x71 smd: 1(-95,-119.61) 2(-69,-119.61) 3(-44,-119.61) 4(-18,-119.61) 5(8,-119.61) 6(33,-119.61) 7(59,-119.61) 8(84,-119.61) 9(84,116.61) 10(59,116.61) 11(33,116.61) 12(8,116.61) 13(-18,116.61) 14(-44,116.61) 15(-69,116.61) 16(-95,116.61)
  silkscreen extent -112,-64 101,61
TSSOP-28_L9.8-W3.0-P0.66-LS6.4-BL [mil]
  rect 16x71 smd: 1(-175,-118.5) 2(-149,-118.5) 3(-124,-118.5) 4(-98,-118.5) 5(-72,-118.5) 6(-47,-118.5) 7(-21,-118.5) 8(4,-118.5) 9(30,-118.5) 10(56,-118.5) 11(81,-118.5) 12(107,-118.5) 13(132,-118.5) 14(158,-118.5) 15(158,109.5) 16(132,109.5) 17(107,109.5) 18(81,109.5) 19(56,109.5) 20(30,109.5) 21(4,109.5) 22(-21,109.5) 23(-47,109.5) 24(-72,109.5) 25(-98,109.5) 26(-124,109.5) 27(-149,109.5) 28(-175,109.5)
  silkscreen extent -201,-68 184,58

## Free pads (board coordinates)
  round 1.524 hole 0.914: 1(168.67,48.24) 2(168.67,50.78) 3(168.67,53.32) 4(168.67,55.86) 5(168.67,58.4) 6(168.67,60.94) 7(168.67,63.48) 8(168.67,66.02) 9(168.67,68.56) 10(168.67,71.1) 11(168.67,73.64) 12(168.67,76.18) 13(168.67,78.72) 14(168.67,81.26) 15(168.67,83.8) 16(168.67,86.34) 17(168.67,88.88) 18(168.67,91.42) 19(168.67,93.96) 20(191.53,48.24) 21(191.53,50.78) 22(191.53,53.32) 23(191.53,55.86) 24(191.53,58.4) 25(191.53,60.94) 26(191.53,63.48) 27(191.53,66.02) 28(191.53,68.56) 29(191.53,71.1) 30(191.53,73.64) 31(191.53,76.18) 32(191.53,78.72) 33(191.53,81.26) 34(191.53,83.8) 35(191.53,86.34) 36(191.53,88.88) 37(191.53,91.42) 38(191.53,93.96)
  round 3 hole 3 unplated: ""(45.1,45.1) ""(45.1,123.1) ""(219.1,45.1) ""(219.1,123.1)
  round 1.152 hole 1.152 unplated: ""(45.1,119.1) ""(49.1,44.1) ""(219.1,73.1)

## Via types
v1: diameter 0.61, hole 0.305, Top Layer to Bottom Layer, 627 vias
v2: diameter 1, hole 0.5, Top Layer to Bottom Layer, 113 vias
v3: diameter 2, hole 1, Top Layer to Bottom Layer, 6 vias

## Nets (pads, with @x,y where several pads share a name; then routed paths per layer and width w, separated by ;. In a path a pad name is that pad's centre, name@x,y a point inside that pad or via, vN(x,y) a via of type N, cw(c..) or ccw(c..) an arc to the next point about the centre after c; other vN are vias at no path point)
0V98S0: CCREF0.1 CURRENT0.3 RCH0.2 RCL0.2 | length 10.6
  Top Layer w0.3: CURRENT0.3@69.6,48.15 69.601,47.7 70.002,47.299 70.901,47.299 72.001,48.399 CCREF0.1@75.1,48.4 ; CCREF0.1@75.1,48.4 RCH0.2@79.1,48.4
0V98S1: CCREF1.1 CURRENT1.3 RCH1.2 RCL1.2 | length 10.6
  Top Layer w0.3: CURRENT1.3@109.6,48.15 109.6,47.7 109.999,47.299 110.7,47.299 111.8,48.399 CCREF1.1@115.1,48.4 RCH1.2@119.1,48.4
0V98S2: CCREF2.1 CURRENT2.3 RCH2.2 RCL2.2 | length 10.6
  Top Layer w0.3: CURRENT2.3@149.6,48.15 149.6,47.599 149.9,47.299 150.7,47.299 151.8,48.399 CCREF2.1@155.1,48.4 ; CCREF2.1@155.1,48.4 RCH2.2@159.1,48.4
3V3: CCD0.1 CCD1.1 CCD2.1 CCDD0.2 CCDD1.2 CCDD2.2 CESPD3V.1 CESPDD3V.1 CGL.2 CGV.2 CPDDV0.1 CPDDV1.1 CPDDV2.1 CPDV0.1 CPDV1.1 CPDV2.1 CPWM0.1 CPWM1.1 CPWM2.1 CSDV0.2 CSDV1.2 CSDV2.2 CSDV3.2 CURRENT0.1 CURRENT0.15 CURRENT0.20 CURRENT1.1 CURRENT1.15 CURRENT1.20 CURRENT2.1 CURRENT2.15 CURRENT2.20 DEBUG.3 DISPLAY.P$4 EXTRA.5 GYRO.8 GYRO.13 JOYSTICK.H1 JOYSTICK.V1 pad.19 POSITION0.13 POSITION1.13 POSITION2.13 PWM0.28 PWM1.28 PWM2.28 R1.2 R2.2 R3.2 R4.2 RBTN0H.1 RBTN1H.1 RJBTNH.2 RPWM1UP.2 RPWM2UP.2 RSH0.1 RSH1.1 RSH2.1 RSH3.1 SENSOR0.P1 SENSOR1.P1 SENSOR2.P1 SENSOR3.P1 SENSOR4.P1 SENSOR5.P1 SENSOR6.P1 SENSOR7.P1 SENSOR8.P1 SENSOR9.P1 SENSOR10.P1 SENSOR11.P1 STRAINS0.8 STRAINS1.1 STRAINS1.8 STRAINS2.8 STRAINS3.8 | length 976.2
  Top Layer w0.25: v1(79.5,112.1) 79.545,112.055 PWM0.28@79.545,110.419 79.864,110.1 CPWM0.1@81.4,110.1 81.4,110.3 82.2,111.1 85.4,111.1 86.344,110.156 CGL.2@86.356,110.156 ; CGL.2@86.3,110.1 CGL.2@86.356,110.156 ; GYRO.8@86.356,111.613 CGL.2@86.356,110.156 ; GYRO.13@89.1,112.355 89.156,112.3 CGV.2@92.1,112.3 ; v1(119.6,111.9) 119.545,111.845 PWM1.28@119.545,110.319 119.764,110.1 CPWM1.1@121.4,110.1 121.399,110.4 122.801,111.8 RPWM1UP.2@122.801,112.1 ; RPWM1UP.2@122.8,112.1 123,112.3 CSDV2.2@125.1,112.3 125.4,112.3 126.8,110.9 RSH2.1@127.1,110.9 ; CSDV2.2@125.211,112.3 125.3,112.3 128.29,115.29 STRAINS2.8@130.589,115.29 ; v1(159.6,111.8) 159.545,111.745 PWM2.28@159.545,110.319 159.764,110.1 CPWM2.1@161.4,110.1 ; CPWM2.1@161.401,110.101 161.401,110.4 162.801,111.8 RPWM2UP.2@162.801,112.1
  Top Layer w0.3: v1(49.6,112.7) 50,112.3 CSDV0.2@54.1,112.3 ; v1(51.2,53) 51.399,53.199 59.999,53.199 61,52.199 CPDDV0.1@61.1,52.2 ; RSH0.1@56.1,110.9 55.8,110.9 54.4,112.3 CSDV0.2@54.1,112.3 ; 58.107,120.4 SENSOR0.P1@58.107,122.1 ; POSITION0.13@59.062,50.557 60.843,50.557 CPDV0.1@61.1,50.3 CPDDV0.1@61.1,52.2 ; STRAINS0.8@59.588,115.29 58.491,115.29 57.599,114.401 57.599,113.7 57.101,113.199 55.001,113.199 CSDV0.2@54.1,112.3 ; v1@67.599,53.1 67.899,53.1 68.6,52.399 CURRENT0.15@68.6,52.05 ; CURRENT0.20@67.65,49.1 67.65,48.15 v1(67.6,48.1) 67.65,48.15 CURRENT0.1@68.6,48.15 ; SENSOR1.P1@68.107,122.1 68.114,122.093 68.114,120.4 ; v1(71.7,52.7) 72,53 75.601,53 76.301,52.3 CCD0.1@76.301,52.1 ; CCD0.1@76.3,52.1 CCDD0.2@78.4,52.1 ; SENSOR2.P1@78.107,122.1 78.118,122.089 78.118,120.4 ; 88.107,120.4 SENSOR3.P1@88.107,122.1 ; v1(89.4,53.2) 100,53.2 101,52.2 CPDDV1.1@101.1,52.2 CPDV1.1@101.1,50.3 ; v1(91.3,113.5) 92.1,112.7 CGV.2@92.1,112.3 CSDV1.2@94.1,112.3 ; STRAINS1.1@94.687,116.291 95.81,116.29 96,116.1 96,114.2 CSDV1.2@94.1,112.3 ; 96,115.227 96.064,115.29 STRAINS1.8@99.589,115.291 ; RSH1.1@96.1,110.901 95.801,110.901 94.401,112.3 CSDV1.2@94.1,112.3 ; 98.106,120.4 SENSOR4.P1@98.106,122.1 ; POSITION1.13@99.062,50.557 100.843,50.557 CPDV1.1@101.1,50.3 ; CURRENT1.20@107.65,49.1 107.6,49.05 v1(107.6,48.1) 107.65,48.15 CURRENT1.1@108.6,48.15 ; v1(108,53) 108,52.9 108.6,52.3 CURRENT1.15@108.6,52.05 ; 108.107,120.4 SENSOR5.P1@108.107,122.1 ; v1(111.4,52.7) 111.701,52.999 115.699,52.999 116.301,52.399 CCD1.1@116.301,52.1 ; CCD1.1@116.3,52.1 CCDD1.2@118.4,52.1 ; 118.107,120.4 SENSOR6.P1@118.107,122.1 ; SENSOR7.P1@128.107,122.1 128.107,120.54 128.246,120.4 ; v1@131.3,53.1 140.1,53.1 141,52.2 CPDV2.1@141.1,52.2 CPDDV2.1@141.1,50.3 140.843,50.557 POSITION2.13@139.062,50.557 ; v1(133.3,113.2) 134.1,112.4 CSDV3.2@134.1,112.3 ; RSH3.1@136.1,110.9 135.8,110.9 134.4,112.3 CSDV3.2@134.1,112.3 ; 138.107,120.4 SENSOR8.P1@138.107,122.1 ; STRAINS3.8@139.59,115.29 138.29,115.29 137.6,114.6 137.6,114.2 136.6,113.2 135,113.2 CSDV3.2@134.1,112.3 ; CURRENT2.20@147.65,49.1 147.65,48.15 v1(147.6,48.1) 147.65,48.15 CURRENT2.1@148.6,48.15 ; v1(147.9,53) 147.9,52.75 CURRENT2.15@148.6,52.05 ; 148.107,120.4 SENSOR9.P1@148.107,122.1 ; v1(151.4,52.6) 151.8,52.999 155.801,52.999 156.301,52.501 CCD2.1@156.3,52.1 ; CCD2.1@156.3,52.1 CCDD2.2@158.4,52.1 ; 158.107,120.4 SENSOR10.P1@158.107,122.1 ; 168.107,120.4 SENSOR11.P1@168.107,122.1 ; 182.999,97.299 182.999,90.201 v1(184.1,89.1) ; v1(184.1,89.1) R4.2@185.4,89.1 ; R2.2@185.4,67.1 v1(185.4,68.1) R1.2@185.4,69.1 ; v1(185.4,84.6) R3.2@185.4,81.1 185.4,79.3 v1(186.1,78.6)
  Top Layer w0.5: v1(51.1,120.5) 51.201,120.4 v1@91.198,120.4 ; v1@91.201,120.4 v1@111.201,120.4 ; v1@111.198,120.4 v1@133.4,120.4 ; v1(133.3,120.5) 133.4,120.4 159.301,120.4 ; v1(151.1,120.5) 151.2,120.4 180.5,120.4 v2(180.7,120.2) ; pad.19@168.671,93.961 169.461,93.961 172.3,96.801 CESPD3V.1@172.3,97.101 ; CESPD3V.1@172.3,97.1 173.1,97.1 CESPDD3V.1@174.4,97.1 ; CESPDD3V.1@174.401,97.101 174.401,96.801 175.099,96.1 181.8,96.1 182.999,97.299 182.999,99.699 181.863,100.835 DISPLAY.P$4@181.151,100.835 ; v2(183.1,107.3) v1(199.4,107.3) ; v1(201.6,107.3) 209.2,99.7 v1(209.2,94.1) RJBTNH.2@209.2,92.8 ; v1(204.8,63.1) 204.8,65.78 JOYSTICK.V1@197.21,73.37 198.37,73.37 202.1,77.1 202.1,79.3 v1(209.1,86.3) RBTN1H.1@209.1,87.4 ; JOYSTICK.H1@204.83,60.67 203.8,59.64 203.8,54.7 v1(203.9,54.6) 204.1,54.4 RBTN0H.1@205.1,54.4
  Bottom Layer w0.25: SENSOR2.P1@78.107,122.1 79.499,120.708 v1(79.5,112.1) ; SENSOR6.P1@118.107,122.1 121,119.207 121,113.3 v1(119.6,111.9) ; v1(159.6,111.8) 168.107,120.306 SENSOR11.P1@168.107,122.1
  Bottom Layer w0.3: v1(51.1,120.5) 49.499,118.899 49.499,112.801 v1(49.6,112.7) 49.499,112.6 49.5,54.163 50.663,53 v1@51.2,53 ; v1(67.6,48.1) v1(67.6,53.1) 68.6,54.101 69.499,54.101 69.499,116.699 73.2,120.4 76.601,120.4 78.107,121.906 SENSOR2.P1@78.107,122.1 ; 69.3,54.1 70.7,54.1 71.7,53.1 v1(71.7,52.7) ; v1(89.4,53.2) 89.499,53.299 89.501,109.504 91.099,111.101 91.099,113.301 v1(91.3,113.5) 91.099,113.7 v1(91.1,120.5) ; v1(107.6,48.1) 108,48.5 v1(108,53) ; v1@108.099,52.999 108.099,53.7 108.501,54.099 109.499,54.099 109.499,116.199 111.201,117.901 v1@111.201,120.499 ; 109.4,54.101 110.2,54.101 111.399,52.9 v1(111.4,52.7) ; v1@131.3,53.1 129.499,54.899 129.499,108.899 133.301,112.699 v1@133.301,120.499 ; v1(133.3,113.2) v1(133.3,120.5) ; v1(147.6,48.1) 147.901,48.401 147.901,53.7 148.3,54.101 149.499,54.101 149.499,116.199 151,117.7 151,120.4 v1(151.1,120.5) ; 149.4,54.101 150.299,54.101 151.399,52.999 v1(151.4,52.6) ; v1(184.1,89.1) 185.4,87.8 v1(185.4,84.6) ; v1(185.4,68.1) 186.1,68.8 v1(186.1,78.6)
  Bottom Layer w0.5: DEBUG.3@179.37,122.1 179.37,121.53 v2(180.7,120.2) 183.1,117.8 v2(183.1,107.3) 183.1,102.785 DISPLAY.P$4@181.151,100.835 ; EXTRA.5@199.37,53.37 202.67,53.37 v1(203.9,54.6) ; v1(199.4,107.3) v1(201.6,107.3) ; v1(204.8,63.1) 204.83,63.07 JOYSTICK.H1@204.83,60.67 ; v1(209.1,86.3) 209.1,94 v1(209.2,94.1)
  other v1: 131.3,53.1 111.1,120.5